# Altium PCB PIN_detector_test_module.PcbDoc
Units mm, origin at the board's own origin, x right, y up, seen from the top; angles counter-clockwise.
Board outline 97.8 x 92.9 mm, 2 copper layers (Top Layer, Bottom Layer); 2 components, 0 nets, 162 pads, 0 vias.
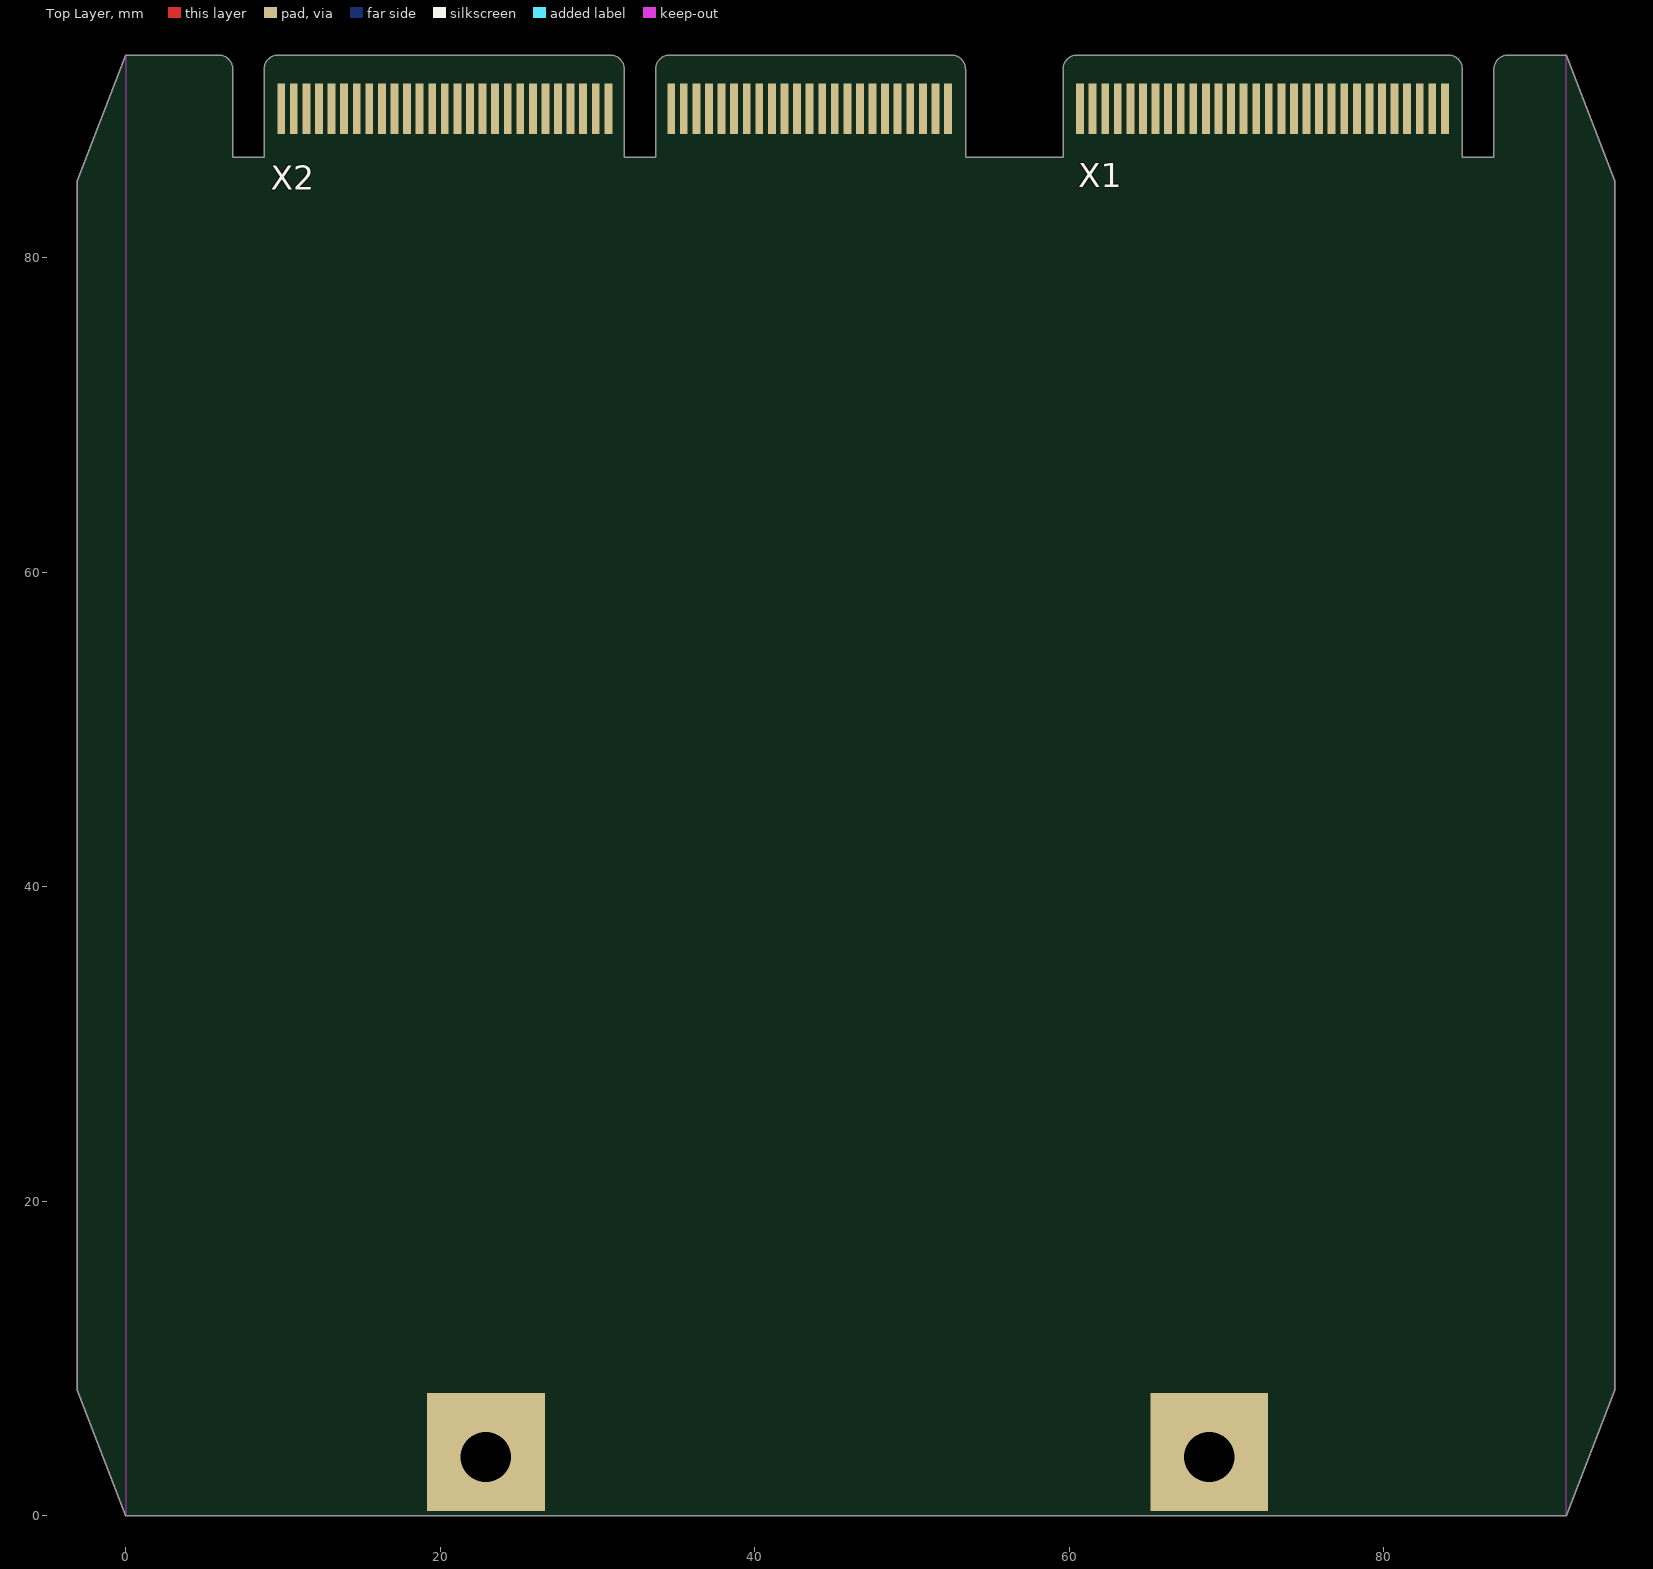
[diagram p0: Top Layer view]
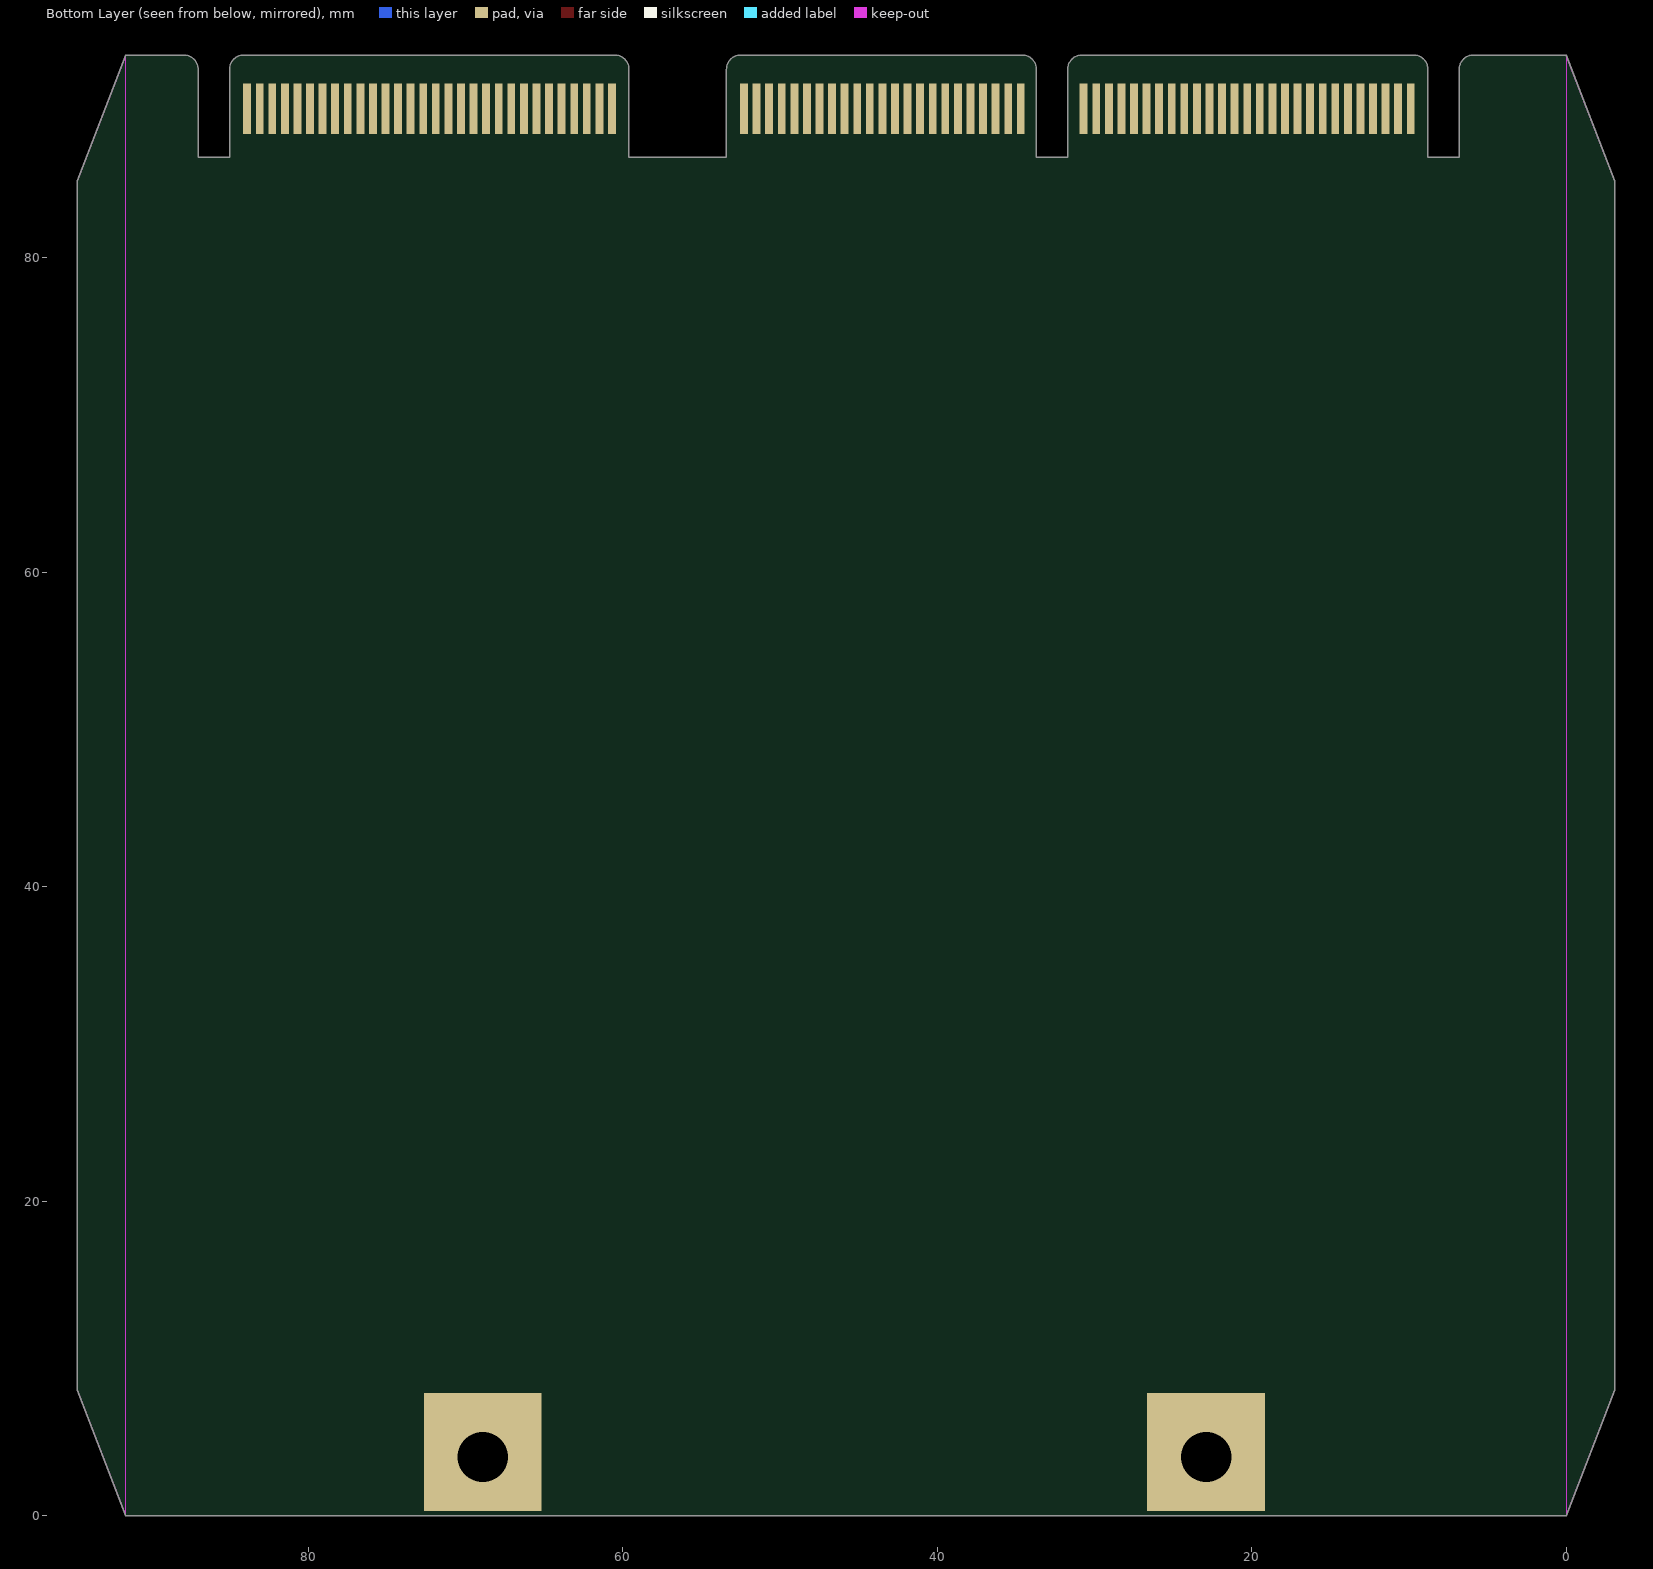
[diagram p1: Bottom Layer view, seen from below]

## Layer stack, top to bottom
Top Solder: solder mask 0.0102, Solder Resist, Dk 3.5
Top Layer: signal copper 0.0356
Dielectric 1: dielectric 0.32, FR-4, Dk 4.8
Bottom Layer: signal copper 0.0356
Bottom Solder: solder mask 0.0102, Solder Resist, Dk 3.5

## Board outline
-3.1,8 -3.1,84.9 0,92.9 5.9,92.9 cw(c5.9,92) 6.8,92 6.8,86.4 8.8,86.4 8.8,91.996 cw(c9.704,91.996) 9.704,92.9 30.792,92.9 cw(c30.792,91.992) 31.7,91.992 31.7,86.4 33.7,86.4 33.7,92 cw(c34.6,92) 34.6,92.9 52.495,92.9 cw(c52.495,91.995) 53.4,91.995 53.4,86.4 59.6,86.4 59.6,91.992 cw(c60.508,91.992) 60.508,92.9 84.1,92.9 cw(c84.1,92) 85,92 85,86.4 87,86.4 87,91.996 cw(c87.904,91.996) 87.904,92.9 91.6,92.9 94.7,84.9 94.7,8 91.6,0 0,0

## Design rules (kind name [scope] priority, off if disabled: settings)
Clearance [All] p1: gap=0.254 ignorepadtopadclearanceinfootprint=FALSE except(0: Arc-Hole Track-Hole SMDPad-Hole THPad-Hole Via-Hole Fill-Hole Poly-Hole Region-Hole Text-Hole)
PolygonConnect [All] p1: connectstyle=Relief reliefconductorwidth=0.254 reliefentries=4 polygonreliefangle="90 Angle" airgapwidth=0.254
RoutingVias [All] p1: holewidth=0.711 width=1.27 viastyle="Through Hole" minholewidth=0.711 minwidth=1.27 maxholewidth=0.711 maxwidth=1.27
SolderMaskExpansion [All] p1: expansion=0.102 istentingtop=FALSE
Width [All] p1: maxlimit=0.254 minlimit=0.254 preferedwidth=0.254
30 further rules are at their usual default settings.

## Components (designator, comment, footprint, x,y, rotation, side; value= is the part's Value field where it differs from the comment)
X1 "HSEC8-130-01-S-DV-A-TR" HSEC8-130-01-S-DV-A-TR_(PLUG) 72.286,89.485 r0 top locked
X2 "HSEC8-150-01-L-DV-A-TR" HSEC8-150-01-L-DV-A-TR_(PLUG) 31.086,89.485 r0 top locked

## Footprints (in the part's own frame and the unit in brackets; to place one, negate y for a bottom-side part, rotate by r counter-clockwise, add the part's x,y. Pads: shape width x height; smd on the part's side, far side on the other; paste and mask are expansions set on the pad)
HSEC8-130-01-S-DV-A-TR_(PLUG) [mm]
  rect 0.5x3.2 smd far side: 1(-11.6,0) 2(-10.8,0) 3(-10,0) 4(-9.2,0) 5(-8.4,0) 6(-7.6,0) 7(-6.8,0) 8(-6,0) 9(-5.2,0) 10(-4.4,0) 11(-3.6,0) 12(-2.8,0) 13(-2,0) 14(-1.2,0) 15(-0.4,0) 16(0.4,0) 17(1.2,0) 18(2,0) 19(2.8,0) 20(3.6,0) 21(4.4,0) 22(5.2,0) 23(6,0) 24(6.8,0) 25(7.6,0) 26(8.4,0) 27(9.2,0) 28(10,0) 29(10.8,0) 30(11.6,0)
  rect 0.5x3.2 smd: 31(11.6,0) 32(10.8,0) 33(10,0) 34(9.2,0) 35(8.4,0) 36(7.6,0) 37(6.8,0) 38(6,0) 39(5.2,0) 40(4.4,0) 41(3.6,0) 42(2.8,0) 43(2,0) 44(1.2,0) 45(0.4,0) 46(-0.4,0) 47(-1.2,0) 48(-2,0) 49(-2.8,0) 50(-3.6,0) 51(-4.4,0) 52(-5.2,0) 53(-6,0) 54(-6.8,0) 55(-7.6,0) 56(-8.4,0) 57(-9.2,0) 58(-10,0) 59(-10.803,0) 60(-11.6,0)
  body extent -14.3,-3.06 14.3,6.24, height 3.3
HSEC8-150-01-L-DV-A-TR_(PLUG) [mm]
  rect 0.5x3.2 smd far side: 1(-21.2,0) 2(-20.4,0) 3(-19.6,0) 4(-18.8,0) 5(-18,0) 6(-17.2,0) 7(-16.4,0) 8(-15.6,0) 9(-14.8,0) 10(-14,0) 11(-13.2,0) 12(-12.4,0) 13(-11.6,0) 14(-10.8,0) 15(-10,0) 16(-9.2,0) 17(-8.4,0) 18(-7.6,0) 19(-6.8,0) 20(-6,0) 21(-5.2,0) 22(-4.4,0) 23(-3.6,0) 24(-2.8,0) 25(-2,0) 26(-1.2,0) 27(-0.4,0) 28(3.6,0) 29(4.4,0) 30(5.2,0) 31(6,0) 32(6.8,0) 33(7.6,0) 34(8.4,0) 35(9.2,0) 36(10,0) 37(10.8,0) 38(11.6,0) 39(12.4,0) 40(13.2,0) 41(14,0) 42(14.8,0) 43(15.6,0) 44(16.4,0) 45(17.2,0) 46(18,0) 47(18.8,0) 48(19.6,0) 49(20.4,0) 50(21.2,0)
  rect 0.5x3.2 smd: 51(21.2,0) 52(20.4,0) 53(19.6,0) 54(18.8,0) 55(18,0) 56(17.2,0) 57(16.4,0) 58(15.6,0) 59(14.8,0) 60(14,0) 61(13.2,0) 62(12.4,0) 63(11.6,0) 64(10.8,0) 65(10,0) 66(9.2,0) 67(8.4,0) 68(7.6,0) 69(6.8,0) 70(6,0) 71(5.2,0) 72(4.4,0) 73(3.6,0) 74(-0.4,0) 75(-1.2,0) 76(-2,0) 77(-2.8,0) 78(-3.6,0) 79(-4.4,0) 80(-5.2,0) 81(-6,0) 82(-6.8,0) 83(-7.6,0) 84(-8.4,0) 85(-9.2,0) 86(-10,0) 87(-10.8,0) 88(-11.6,0) 89(-12.4,0) 90(-13.2,0) 91(-14,0) 92(-14.8,0) 93(-15.6,0) 94(-16.4,0) 95(-17.2,0) 96(-18,0) 97(-18.8,0) 98(-19.6,0) 99(-20.403,0) 100(-21.2,0)
  body extent -23.91,-3.06 23.89,6.24, height 3.3

## Part data
X1: library part UniBus_APS_Connector
X2: library part UniBus_Main_Connector

## Free pads (board coordinates)
  rect 7.5x7.5 / inner rect 0x0 / far side rect 7.5x7.5 hole 3.2 copper offset 0,0.3: MH0(22.9,3.75) MH1(68.9,3.75)

## Nets (pads, with @x,y where several pads share a name; then routed paths per layer and width w, separated by ;. In a path a pad name is that pad's centre, name@x,y a point inside that pad or via, vN(x,y) a via of type N, cw(c..) or ccw(c..) an arc to the next point about the centre after c; other vN are vias at no path point)
pads on no net: X1.1 X1.2 X1.3 X1.4 X1.5 X1.6 X1.7 X1.8 X1.9 X1.10 X1.11 X1.12 X1.13 X1.14 X1.15 X1.16 X1.17 X1.18 X1.19 X1.20 X1.21 X1.22 X1.23 X1.24 X1.25 X1.26 X1.27 X1.28 X1.29 X1.30 X1.31 X1.32 X1.33 X1.34 X1.35 X1.36 X1.37 X1.38 X1.39 X1.40 X1.41 X1.42 X1.43 X1.44 X1.45 X1.46 X1.47 X1.48 X1.49 X1.50 X1.51 X1.52 X1.53 X1.54 X1.55 X1.56 X1.57 X1.58 X1.59 X1.60 X2.1 X2.2 X2.3 X2.4 X2.5 X2.6 X2.7 X2.8 X2.9 X2.10 X2.11 X2.12 X2.13 X2.14 X2.15 X2.16 X2.17 X2.18 X2.19 X2.20 X2.21 X2.22 X2.23 X2.24 X2.25 X2.26 X2.27 X2.28 X2.29 X2.30 X2.31 X2.32 X2.33 X2.34 X2.35 X2.36 X2.37 X2.38 X2.39 X2.40 X2.41 X2.42 X2.43 X2.44 X2.45 X2.46 X2.47 X2.48 X2.49 X2.50 X2.51 X2.52 X2.53 X2.54 X2.55 X2.56 X2.57 X2.58 X2.59 X2.60 X2.61 X2.62 X2.63 X2.64 X2.65 X2.66 X2.67 X2.68 X2.69 X2.70 X2.71 X2.72 X2.73 X2.74 X2.75 X2.76 X2.77 X2.78 X2.79 X2.80 X2.81 X2.82 X2.83 X2.84 X2.85 X2.86 X2.87 X2.88 X2.89 X2.90 X2.91 X2.92 X2.93 X2.94 X2.95 X2.96 X2.97 X2.98 X2.99 X2.100

## Keep-outs
Keep-Out Layer:
  region: 0,92.862 0,0 -3.099,8.001 -3.1,84.902
  region: 91.602,0 91.596,92.898 94.702,84.897 94.698,7.996

## Silkscreen, mask and mechanical layers (free items; w line width, h text height)
Board:
  circle w0.1: c68.9,3.75 r1.7
  circle w0.1: c68.9,3.75 r1.7
  circle w0.1: c22.9,3.75 r1.7
  circle w0.1: c22.9,3.75 r1.7
  lines w0.1: -3.1,8 -3.1,84.9 ; -3.1,8 -3.1,84.9 ; -3.1,8 -3.1,84.9 ; -3.1,8 0,0 ; -3.1,8 0,0 ; -3.1,8 0,0 ; -3.1,84.9 0,92.9 ; -3.1,84.9 0,92.9 ; -3.1,84.9 0,92.9 ; 0,0 91.6,0 ; 0,0 91.6,0 ; 0,0 91.6,0 ; 0,0 0,92.9 ; 0,92.9 5.9,92.9 cw(c5.9,92) 6.8,92 ; 6.8,86.4 8.8,86.4 ; 6.8,86.4 8.8,86.4 ; 6.8,86.4 8.8,86.4 ; 6.8,86.4 6.8,92 ; 6.8,86.4 6.8,92 ; 6.8,86.4 6.8,92 ; 8.8,86.4 31.7,86.4 ; 8.8,86.4 8.8,91.996 cw(c9.704,91.996) 9.704,92.9 30.792,92.9 ; 8.8,86.4 8.8,91.973 ; 8.8,86.4 8.8,91.973 ; 8.8,86.4 8.8,91.973 ; 9.727,92.9 30.792,92.9 ; 9.727,92.9 30.792,92.9 ; 9.727,92.9 30.792,92.9 ; 30.792,92.9 cw(c30.792,91.992) 31.7,91.992 ; 30.792,92.9 30.792,92.9 ; 31.7,86.4 33.7,86.4 ; 31.7,86.4 33.7,86.4 ; 31.7,86.4 33.7,86.4 ; 31.7,86.4 31.7,91.992 ; 31.7,86.4 31.7,91.992 ; 31.7,86.4 31.7,91.992 ; 31.7,86.4 31.7,91.992 ; 33.7,86.4 53.4,86.4 ; 33.7,86.4 33.7,92 cw(c34.6,92) 34.6,92.9 52.501,92.9 ; 33.7,86.4 33.7,91.995 ; 33.7,86.4 33.7,91.995 ; 33.7,86.4 33.7,91.995 ; 34.605,92.9 52.495,92.9 cw(c52.495,91.995) 53.4,91.995 53.4,86.4 ; 34.605,92.9 52.501,92.9 ; 34.605,92.9 52.501,92.9 ; 53.4,86.4 59.6,86.4 ; 53.4,86.4 59.6,86.4 ; 53.4,86.4 59.6,86.4 ; 53.4,86.4 53.4,92.001 ; 53.4,86.4 53.4,92.001 ; 53.4,86.4 53.4,92.001 ; 59.6,86.4 85,86.4 ; 59.6,86.4 59.6,91.992 cw(c60.508,91.992) 60.508,92.9 84.1,92.9 ; 59.6,86.4 59.6,91.999 ; 59.6,86.4 59.6,91.999 ; 59.6,86.4 59.6,91.999 ; 60.501,92.9 84.1,92.9 ; 60.501,92.9 84.1,92.9 ; 60.501,92.9 84.1,92.9 ; 84.1,92.9 cw(c84.1,92) 85,92 ; 85,86.4 87,86.4 ; 85,86.4 87,86.4 ; 85,86.4 87,86.4 ; 85,86.4 85,92 ; 85,86.4 85,92 ; 85,86.4 85,92 ; 85,86.4 85,92 ; 87,86.4 87,91.996 cw(c87.904,91.996) 87.904,92.9 91.6,92.9 ; 87,86.4 87,92 87,86.4 ; 91.6,0 91.6,92.9 ; 91.6,0 94.7,8 ; 91.6,0 94.7,8 ; 91.6,0 94.7,8 ; 91.6,92.9 94.7,84.9 ; 91.6,92.9 94.7,84.9 ; 91.6,92.9 94.7,84.9 ; 91.6,92.9 87.9,92.9 91.6,92.9 ; 94.7,8 94.7,84.9 ; 94.7,8 94.7,84.9 ; 94.7,8 94.7,84.9 ; 19.15,0 19.15,7.5 26.65,7.5 26.65,0 19.15,0 ; 65.15,0 65.15,7.5 72.65,7.5 72.65,0 65.15,0